# Altium PCB PCB atium .pcbdoc
Units mm, origin at the board's own origin, x right, y up, seen from the top; angles counter-clockwise.
Board outline 277.29 x 166.6 mm, 2 copper layers (Top Layer, Bottom Layer); 98 components, 97 nets, 331 pads, 103 vias.
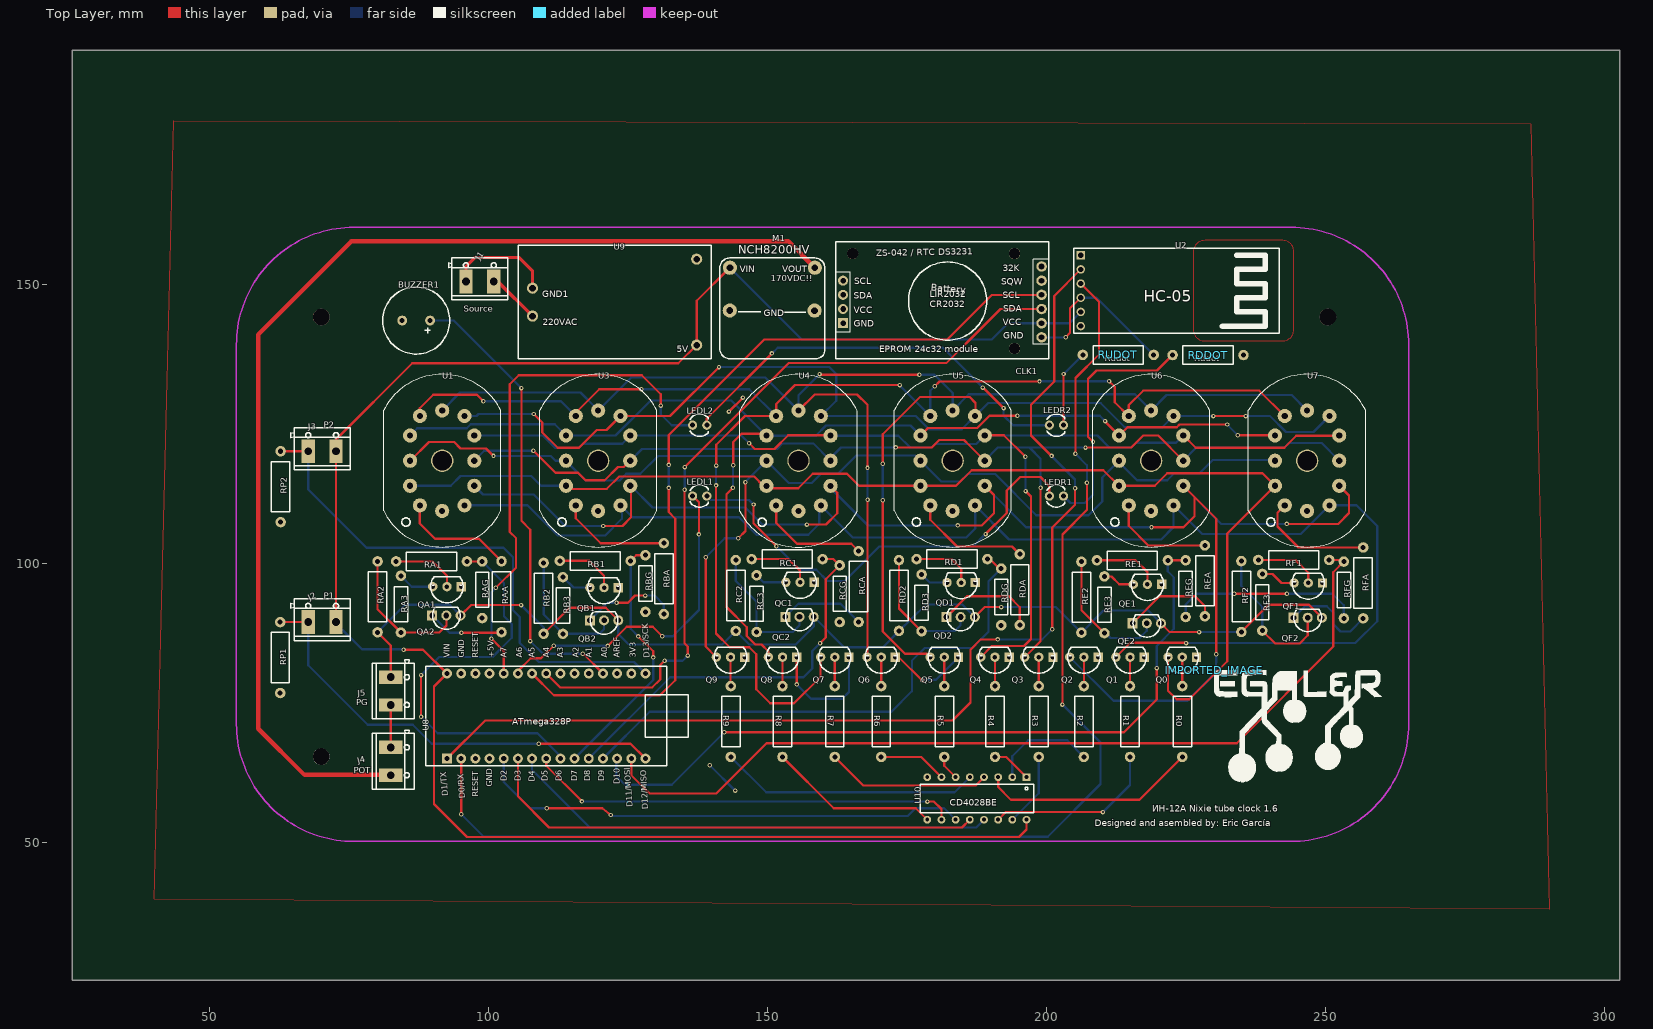
[diagram p0: Top Layer view]
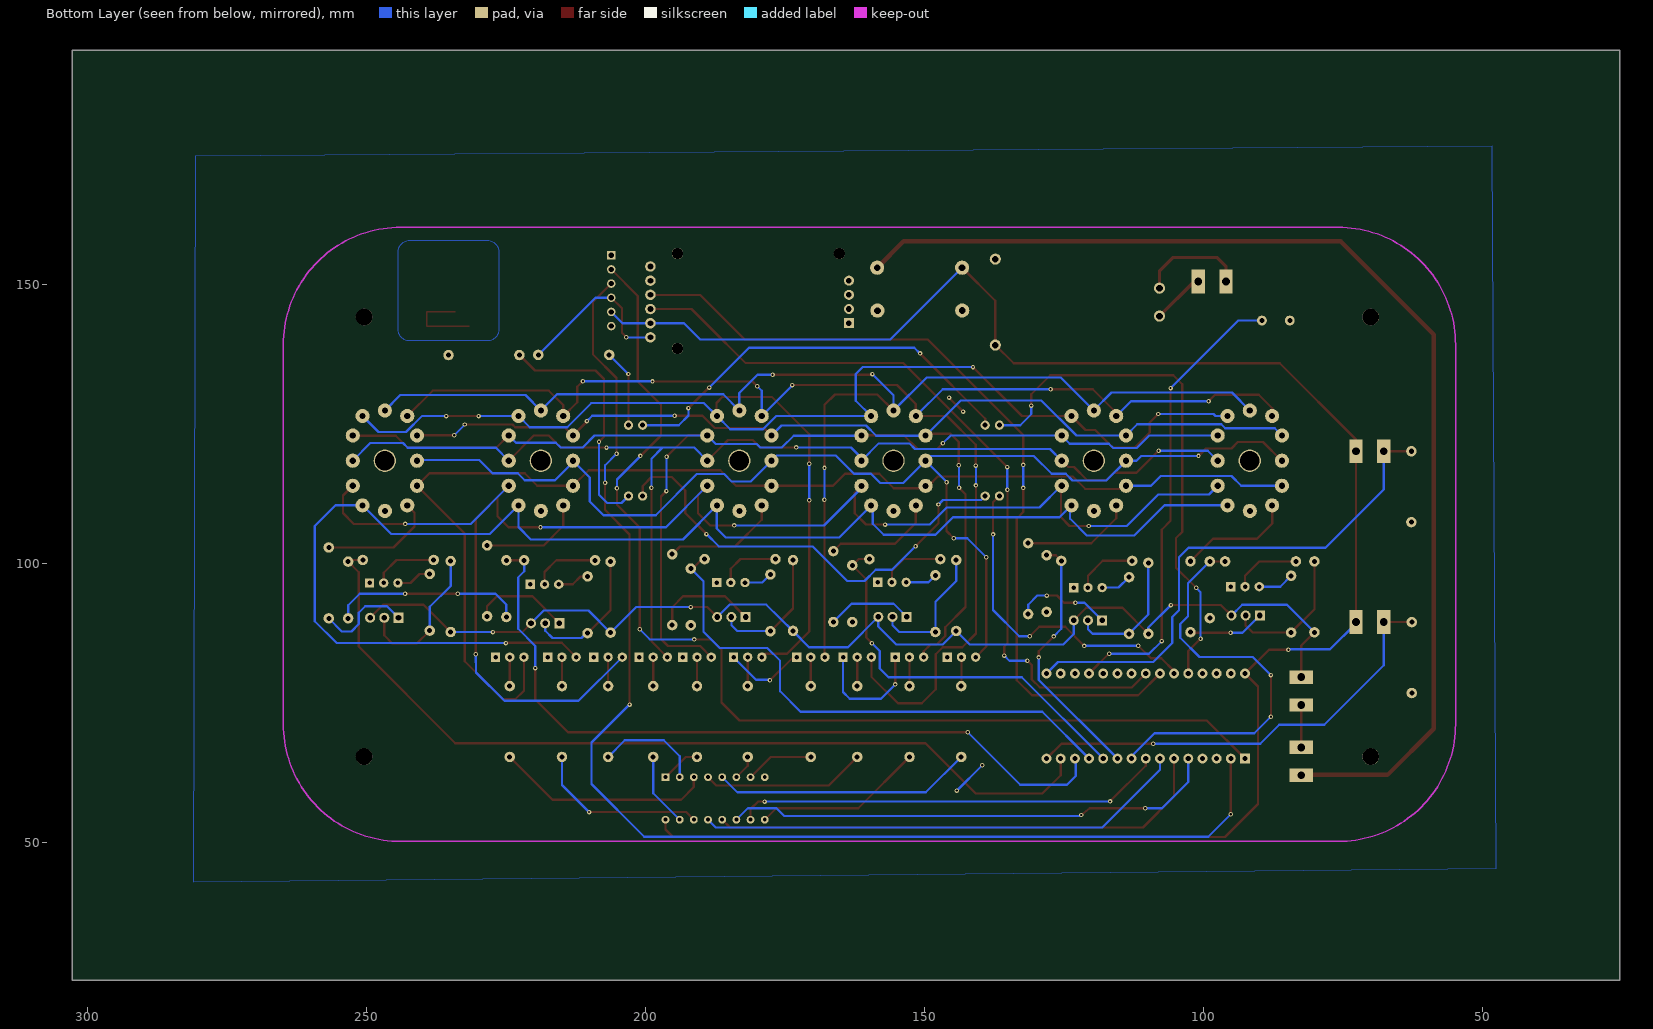
[diagram p1: Bottom Layer view, seen from below]

## Layer stack, top to bottom
Top Layer: signal copper (thickness not stored)
Dielectric: dielectric 0.32, FR-4, Dk 4.8
Bottom Layer: signal copper (thickness not stored)

## Board outline
302.688,25.4 25.4,25.4 25.4,192 302.688,192

## Components (designator, comment, footprint, x,y, rotation, side; value= is the part's Value field where it differs from the comment)
BUZZER1 "PS1240P02CT3" B-12*5.0 87.047,143.54 r180 top
CLK1 "ZS_042/DS3231" ZS-042/DS3231 162.246,157.04 r0 top
IMPORTED_IMAGE "IMPORTED_IMAGE" IMPORTED_IMAGE 230.004,80.87 r0 top
J1 "SUPPLY BLOCK" TERMINAL_BLOCK_2P_5 98.447,150.54 r0 top
J2 "P1 BLOCK" TERMINAL_BLOCK_2P_5 70.197,89.525 r0 top
J3 "P2 BLOCK" TERMINAL_BLOCK_2P_5 70.197,120.124 r0 top
J4 "POT1 200K" TERMINAL_BLOCK_2P_5 82.497,64.59 r270 top
J5 "PG" TERMINAL_BLOCK_2P_5 82.492,77.175 r270 top
LEDL1 "204-10SURD/S530-A3" LED-3MM/2.54 137.837,112.105 r90 top
LEDL2 "204-10SURD/S530-A3" LED-3MM/2.54 137.837,124.8 r90 top
LEDR1 "204-10SURD/S530-A3" LED-3MM/2.54 201.741,112.105 r90 top
LEDR2 "204-10SURD/S530-A3" LED-3MM/2.54 201.741,124.8 r90 top
M1 "M1" ?#1 150.846,148.092 r0 top
Q0 "MPSA42" TO92-INLINE 224.281,83.25 r180 top
Q1 "MPSA42" TO92-INLINE 214.931,83.25 r180 top
Q2 "MPSA42" TO92-INLINE 206.661,83.25 r180 top
Q3 "MPSA42" TO92-INLINE 198.581,83.25 r180 top
Q4 "MPSA42" TO92-INLINE 190.726,83.25 r180 top
Q5 "MPSA42" TO92-INLINE 181.651,83.25 r180 top
Q6 "MPSA42" TO92-INLINE 170.356,83.25 r180 top
Q7 "MPSA42" TO92-INLINE 162.036,83.25 r180 top
Q8 "MPSA42" TO92-INLINE 152.676,83.25 r180 top
Q9 "MPSA42" TO92-INLINE 143.362,83.25 r180 top
QA1 "MPSA42" TO92-INLINE 92.558,95.876 r180 top
QA2 "MPSA92" TO-92-3_L4.8-W3.7-P2.54-R 92.457,90.7 r180 top
QB1 "MPSA42" TO92-INLINE 120.702,95.705 r180 top
QB2 "MPSA92" TO-92-3_L4.8-W3.7-P2.54-R 120.707,89.835 r180 top
QC1 "MPSA42" TO92-INLINE 155.812,96.655 r180 top
QC2 "MPSA92" TO-92-3_L4.8-W3.7-P2.54-R 155.711,90.46 r180 top
QD1 "MPSA42" TO92-INLINE 184.678,96.61 r180 top
QD2 "MPSA92" TO-92-3_L4.8-W3.7-P2.54-R 184.576,90.445 r180 top
QE1 "MPSA42" TO92-INLINE 218.037,96.285 r180 top
QE2 "MPSA92" TO-92-3_L4.8-W3.7-P2.54-R 217.936,89.315 r180 top
QF1 "MPSA42" TO92-INLINE 246.857,96.535 r180 top
QF2 "MPSA92" TO-92-3_L4.8-W3.7-P2.54-R 246.756,90.305 r180 top
R0 "18k" AXIAL-0.5 224.291,71.715 r90 top
R1 "18k" AXIAL-0.5 214.921,71.715 r90 top
R2 "18k" AXIAL-0.5 206.656,71.715 r270 top
R3 "18k" AXIAL-0.5 198.586,71.715 r90 top
R4 "18k" AXIAL-0.5 190.741,71.715 r270 top
R5 "18k" AXIAL-0.5 181.656,71.715 r270 top
R6 "18k" AXIAL-0.5 170.356,71.715 r270 top
R7 "18k" AXIAL-0.5 162.032,71.715 r90 top
R8 "18k" AXIAL-0.5 152.662,71.715 r90 top
R9 "18k" AXIAL-0.5 143.412,71.715 r90 top
RA1 "18k" AXIAL-0.5 89.792,100.395 r0 top
RA2 "18k" AXIAL-0.5 80.132,94.04 r270 top
RA3 "680k" AXIAL-0.4 84.312,92.74 r270 top
RAA "22k" AXIAL-0.5 102.332,94.075 r270 top
RAG "180k" AXIAL-0.4 98.872,95.32 r270 top
RB1 "18k" AXIAL-0.5 119.127,100.5 r0 top
RB2 "18k" AXIAL-0.5 109.882,93.785 r270 top
RB3 "680k" AXIAL-0.4 113.337,92.5 r270 top
RBA "22k" AXIAL-0.5 131.412,97.315 r270 top
RBG "180k" AXIAL-0.4 128.107,96.425 r270 top
RC1 "18k" AXIAL-0.5 153.497,100.805 r0 top
RC2 "18k" AXIAL-0.5 144.308,94.285 r270 top
RC3 "680k" AXIAL-0.4 148.032,92.825 r270 top
RCA "22k" AXIAL-0.5 166.312,95.89 r270 top
RCG "180k" AXIAL-0.4 162.912,94.615 r270 top
RD1 "18k" AXIAL-0.5 183.031,100.81 r0 top
RD2 "18k" AXIAL-0.5 173.533,94.29 r270 top
RD3 "680k" AXIAL-0.4 177.586,92.975 r270 top
RDA "22k" AXIAL-0.5 195.171,95.34 r270 top
RDDOT "18k" AXIAL-0.5 228.901,137.365 r180 top
RDG "180k" AXIAL-0.4 191.851,94.035 r270 top
RE1 "18k" AXIAL-0.5 215.346,100.595 r0 top
RE2 "18k" AXIAL-0.5 206.218,93.99 r270 top
RE3 "680k" AXIAL-0.4 210.336,92.625 r270 top
REA "22k" AXIAL-0.5 228.336,96.91 r270 top
REG "180k" AXIAL-0.4 224.891,95.515 r270 top
RF1 "18k" AXIAL-0.5 244.251,100.65 r0 top
RF2 "18k" AXIAL-0.5 234.866,94.1 r270 top
RF3 "680k" AXIAL-0.4 238.616,93.075 r270 top
RFA "22k" AXIAL-0.5 256.696,96.54 r270 top
RFG "180k" AXIAL-0.4 253.226,95.28 r270 top
RP1 "22K" AXIAL-0.5 62.692,83.17 r270 top
RP2 "22K" AXIAL-0.5 62.772,113.78 r270 top
RUDOT "18k" AXIAL-0.5 212.811,137.39 r180 top
U1 "IN-12a" IN-12A 91.707,118.44 r0 top
U2 "HC-05 Module 6Pin" "HC-05 MODULE 6PIN" 206.091,142.55 r0 top
U3 "IN-12a" IN-12A 119.647,118.44 r0 top
U4 "IN-12a" IN-12A 155.537,118.425 r0 top
U5 "IN-12a" IN-12A 183.147,118.44 r0 top
U6 "IN-12a" IN-12A 218.707,118.44 r0 top
U7 "IN-12a" IN-12A 246.647,118.44 r0 top
U8 "ARDUINO_NANO" ARDUINO_NANO 110.347,72.69 r90 top
U9 "HLK-PM01" PWRM-TH_HLK-PM01 122.597,146.84 r0 top
U10 "MC14028BCP" DIP16 187.491,57.935 r180 top
? "" ?#2 137.602,139.512 r0 top
? "" ?#2 105.659,138.851 r0 top
? "" ?#2 68.077,146.896 r0 top
? "" ?#2 69.481,76.563 r0 top
? "" ?#2 62.384,105.255 r0 top
? "" ?#2 159.987,143.359 r0 top
? "" ?#2 182.122,159.463 r0 top
? "" ?#2 159.853,147.197 r0 top
? "" ?#2 181.042,156.751 r0 top

## Footprints (in the part's own frame and the unit in brackets; to place one, negate y for a bottom-side part, rotate by r counter-clockwise, add the part's x,y. Pads: shape width x height; smd on the part's side, far side on the other; paste and mask are expansions set on the pad)
ARDUINO_NANO [mil]
  rect 70x70 hole 36: 1(-300,700)
  round 70 hole 36: 2(-300,600) 3(-300,500) 4(-300,400) 5(-300,300) 6(-300,200) 7(-300,100) 8(-300,0) 9(-300,-100) 10(-300,-200) 11(-300,-300) 12(-300,-400) 13(-300,-500) 14(-300,-600) 15(-300,-700) 16(300,-700) 17(300,-600) 18(300,-500) 19(300,-400) 20(300,-300) 21(300,-200) 22(300,-100) 23(300,0) 24(300,100) 25(300,200) 26(300,300) 27(300,400) 28(300,500) 29(300,600) 30(300,700)
  silkscreen extent -350,-1000 350,850
AXIAL-0.4 [mil]
  round 74 hole 35.4: 1(-200,0) 2(200,0)
  silkscreen extent -124,-47 124,47
AXIAL-0.5 [mil]
  round 74 hole 35.4: 1(-250,0) 2(250,0)
  silkscreen extent -177,-65 177,65
B-12*5.0 [mil]
  round 70 hole 35.4: 1(-98.45,0) 2(98.45,0)
  silkscreen extent -236,-236 236,236
DIP16 [mil]
  rect 55x55 hole 28: 1(-350,-150)
  round 55 hole 28: 2(-250,-150) 3(-150,-150) 4(-50,-150) 5(50,-150) 6(150,-150) 7(250,-150) 8(350,-150) 9(350,150) 10(250,150) 11(150,150) 12(50,150) 13(-50,150) 14(-150,150) 15(-250,150) 16(-350,150)
  silkscreen extent -400,-100 400,100
"HC-05 MODULE 6PIN" [mil]
  round 60 hole 36: 1(0,0) 2(0,100) 3(0,200) 4(0,300) 5(0,400)
  rect 60x60 hole 36: 6(0,500)
  Top Layer lines w10: 1000,0 1300,0 1300,100 1100,100
  silkscreen extent -50,-50 1400,550
IMPORTED_IMAGE [mm]
  silkscreen extent 0,-20 30,0
IN-12A [mm]
  round 2.54 hole 1.1: 0(-5.75,-4.5) 1(4,-8) 2(5.75,-4.5) 3(5.75,0) 4(5.75,4.5) 5(3.998,8.001) 6(0,9) 7(-4.003,8) 8(-5.75,4.5) 9(-5.75,0) A(-4.003,-8.001) LHDP(-0.003,-8.999)
  round 4 hole 3.5: 13(0,0)
  silkscreen extent -10.5,-15.48 10.5,15.48
LED-3MM/2.54 [mil]
  round 65 hole 35.43: 1(0,50) 2(0,-50)
  silkscreen extent -79,-59 79,69
PWRM-TH_HLK-PM01 [mm]
  round 2 hole 1.2: 1(-14.7,2.5) 2(-14.7,-2.5) 3(14.7,7.7) 4(14.7,-7.7)
  silkscreen extent -17.24,-10.12 17.3,10.2
TERMINAL_BLOCK_2P_5 [mm]
  rect 2.38x4.285 hole 1.402: 1(2.489,0) 2(-2.489,0)
  silkscreen extent -5.59,-3.3 5,4.22
TO92-INLINE [mil]
  rect 66x66 hole 32: 1(-100,0)
  round 66 hole 32: 2(0,0) 3(100,0)
  silkscreen extent -114,-70 114,114
TO-92-3_L4.8-W3.7-P2.54-R [mm]
  rect 1.8x1.8 hole 1: 1(2.54,0)
  round 1.8 hole 1: 2(0,0) 3(-2.54,0)
  silkscreen extent -2.48,-1.5 2.48,2.48
ZS-042/DS3231 [mm]
  silkscreen extent 0,-20.32 38.1,0.64
?#1 [mm]
  round 2.54 hole 1.2: 1(-7.6,4.917) 1(-7.599,4.917) 2(7.62,4.917) 3(-7.62,-2.736) 3(-7.619,-2.751) 4(7.571,-2.766)
  silkscreen extent -9.4,-11.37 9.4,6.66
?#2 [mm]

## Free pads (board coordinates)
  round 1.8 hole 1: 1(163.516,150.69) 2(163.516,148.15) 3(163.516,145.61)
  rect 1.8x1.8 hole 1: 4(163.516,143.07)
  round 1.88 hole 1.016: 5(199.076,153.23) 6(199.076,150.69) 7(199.076,148.15) 8(199.076,145.61) 9(199.076,143.07) 10(199.076,140.53)
  round 3 hole 3 unplated: ""(70.037,65.43) ""(70.037,144.17) ""(250.377,65.43) ""(250.377,144.17)
  round 2 hole 2 unplated: ""(165.246,155.54) ""(194.246,138.54) ""(194.246,155.54)

## Via types
v1: diameter 0.8, hole 0.4, Top Layer to Bottom Layer, 103 vias

## Nets (pads, with @x,y where several pads share a name; then routed paths per layer and width w, separated by ;. In a path a pad name is that pad's centre, name@x,y a point inside that pad or via, vN(x,y) a via of type N, cw(c..) or ccw(c..) an arc to the next point about the centre after c; other vN are vias at no path point)
5V: J2.1 J3.1 M1.1 pad.9 U2.2 U8.30 U9.4 U10.16 | length 350
  Top Layer w0.4: J2.1@72.686,89.29 72.686,120.09 72.687,122.23 86.347,135.89 133.998,135.89 137.246,139.139 U9.4 ; v1(84.797,84.59) 88.287,84.59 U8.30 ; U8.30 90.246,77.988 90.246,56.939 96.147,51.039 195.047,51.039 196.383,52.372 U10.16 ; U9.4 137.296,147.106 M1.1@143.247,153.057
  Bottom Layer w0.4: J2.1@72.685,89.289 77.334,84.64 80.297,84.64 84.747,84.64 v1(84.797,84.59) ; M1.1@143.246,153.01 156.121,140.134 190.142,140.134 193.076,143.071 pad.9 204.071,143.071 U2.2
170V: J4.1 M1.2 | length 206.4
  Top Layer w0.8: J4.1 82.456,62.139 67.046,62.139 58.748,70.439 58.748,141.039 75.446,157.739 153.736,157.739 M1.2
220VAC: J1.1 U9.2 | length 9.5
  Top Layer w0.6: J1.1 101.696,150.54 U9.2
BC0: Q0.2 R0.2 | length 5.2
  Top Layer w0.4: Q0.2@224.282,83.249 R0.2
BC1: Q1.2 R1.2 | length 5.2
  Top Layer w0.4: R1.2 Q1.2@214.932,83.249
BC2: Q2.2 R2.1 | length 5.2
  Top Layer w0.4: R2.1 Q2.2@206.662,83.249
BC3: Q3.2 R3.2 | length 5.2
  Top Layer w0.4: Q3.2@198.582,83.249 R3.2
BC4: Q4.2 R4.1 | length 5.2
  Top Layer w0.4: Q4.2@190.726,83.249 R4.1
BC5: Q5.2 R5.1 | length 5.2
  Top Layer w0.4: Q5.2@181.651,83.249 R5.1
BC6: Q6.2 R6.1 | length 5.2
  Top Layer w0.4: R6.1 Q6.2
BC7: Q7.2 R7.2 | length 5.2
  Top Layer w0.4: R7.2 Q7.2@162.037,83.249
BC8: Q8.2 R8.2 | length 5.2
  Top Layer w0.4: R8.2 Q8.2
BC9: Q9.2 R9.2 | length 5.2
  Top Layer w0.4: Q9.2 143.362,78.115 R9.2
BT1: U2.5 U8.1 | length 196.7
  Top Layer w0.4: U8.1 99.408,71.91 183.126,71.91 186.357,75.141 186.357,84.595 188.191,86.429 v1(191.247,86.429) ; v1(200.861,119.29) 197.201,122.95 197.201,128.47 201.341,132.61 201.341,147.961 U2.5 ; v1(200.977,88.225) 200.977,106.47 205.076,110.57 v1(205.076,113.485)
  Bottom Layer w0.4: v1(191.247,86.429) 199.181,86.429 v1(200.977,88.225) ; v1(200.861,119.29) 205.076,115.075 v1(205.076,113.485)
BT2: U2.4 U8.2 | length 228.3
  Top Layer w0.4: v1(95.107,55.11) U8.2 ; v1(202.821,74.755) 202.822,105.23 207.197,109.605 v1(207.197,114.505) ; v1@205.161,119.68 205.161,133.259 209.388,137.485 209.388,146.873 U2.4
  Bottom Layer w0.4: v1(95.107,55.11) 99.149,51.069 200.18,51.069 209.636,60.526 209.636,67.94 v1(202.821,74.755) ; v1(205.146,119.68) 207.197,117.63 v1(207.197,114.505)
BUZZER1: BUZZER1.1 U8.19 | length 82.8
  Top Layer w0.4: v1(105.897,131.439) 105.898,107.678 107.497,106.079 v1(107.497,86.115) ; v1(116.892,83.855) 116.963,83.855 U8.19
  Bottom Layer w0.4: BUZZER1.1 93.797,143.54 v1(105.897,131.439) ; v1(107.497,86.115) 109.757,83.855 v1(116.892,83.855)
DDOT: LEDL1.1 U8.25 | length 59.7
  Top Layer w0.4: U8.25 105.27,80.775 107.564,83.03 109.405,83.03 v1(111.672,85.295) ; v1(121.347,85.26) 124.772,88.685 129.442,88.685 v1(131.132,86.995) ; LEDL1.1 137.691,110.98 v1(137.691,105.24)
  Bottom Layer w0.4: v1(111.672,85.295) 121.312,85.295 v1(121.347,85.26) ; v1(131.132,86.995) 133.004,86.995 137.691,91.682 v1(137.691,105.24)
GND1: J1.2 U9.1 | length 19.3
  Top Layer w0.6: J1.2 95.959,153.2 97.607,154.849 105.438,154.849 107.897,152.39 U9.1
GND2: BUZZER1.2 M1.3 pad.10 RAG.2 RBG.2 RCG.2 RDDOT.1 RDG.2 REG.2 RFG.2 RP1.2 RP2.2 RUDOT.1 U2.3 U8.4 U8.18 U8.29 U9.3 U10.8 | length 70.9
  Top Layer w0.4: v1(203.406,140.565) 204.191,141.349 204.191,145.73 U2.3 ; v1(233.606,94.62) v1(243.031,94.62)
  Bottom Layer w0.4: v1(139.627,63.895) 144.172,59.35 v1(144.192,59.35) ; pad.10 203.372,140.531 v1(203.406,140.565) ; U2.3 208.921,147.63 RUDOT.1 ; REG.2 224.891,92.69 226.821,94.62 v1(233.606,94.62) ; v1(243.031,94.62) 251.156,94.62 253.226,92.549 RFG.2
GND3: M1.4 Q0.1 Q1.1 Q2.1 Q3.1 Q4.1 Q5.1 Q6.1 Q7.1 Q8.1 Q9.1 QA1.1 QB1.1 QC1.1 QD1.1 QE1.1 QF1.1 | length 40.4
  Top Layer w0.4: v1(143.072,127.245) 143.087,127.245 v1(145.577,129.735) ; v1(155.216,78.36) Q8.1 ; Q6.1@172.896,83.25 173.516,83.25 v1(177.676,79.09)
  Bottom Layer w0.4: v1(155.216,78.36) 157.792,75.784 163.37,75.784 164.577,76.99 Q7.1@164.577,83.249 ; v1(177.676,79.09) 177.796,79.21 180.151,79.21 Q5.1
J4_2: J4.2 J5.1 | length 7.6
  Top Layer w0.4: J5.1 J4.2
LEDL1_2: LEDL1.2 LEDR1.1 | length 82.2
  Top Layer w0.4: v1(147.486,110.59) 147.486,107.225 v1(151.587,103.125) ; v1(189.046,105.295) 192.827,109.075 192.827,113.088 195.242,115.504 198.872,115.504 200.472,113.904 LEDR1.1
  Bottom Layer w0.4: LEDL1.2 139.797,111.415 146.662,111.415 v1(147.486,110.59) ; v1(151.587,103.125) 155.814,98.895 158.707,98.895 160.726,96.876 163.838,96.876 170.053,103.089 186.842,103.089 v1(189.046,105.295)
LEDR1_2: LEDR1.2 RDDOT.2 | length 44.5
  Top Layer w0.4: v1(208.292,121.835) 207.386,122.74 207.386,133.055 208.913,134.579 219.766,134.579 RDDOT.2
  Bottom Layer w0.4: LEDR1.2 204.276,110.84 206.811,110.84 208.292,112.32 v1(208.292,121.835)
LEDR2_1: LEDL2.2 LEDR2.1 | length 74.3
  Top Layer w0.4: LEDL2.2 139.106,125.974 v1(150.777,137.645) ; v1(188.551,131.54) 188.591,131.54 v1(192.271,127.86)
  Bottom Layer w0.4: v1(150.777,137.645) 151.816,138.685 181.406,138.685 v1(188.551,131.54) ; v1(192.271,127.86) 192.27,126.515 193.987,124.8 LEDR2.1
LEDR2_2: LEDR2.2 RUDOT.2 | length 14
  Top Layer w0.4: LEDR2.2 v1@203.012,133.974
  Bottom Layer w0.4: v1@203.011,133.975 203.046,133.975 RUDOT.2
  other v1: 203.011,133.97
N0: Q0.3 U1.0 U3.0 U4.0 U5.0 U6.0 U7.0 | length 219.6
  Top Layer w0.4: U3.0 114.445,113.391 121.199,113.391 123.414,115.606 147.592,115.606 149.273,113.924 U4.0 150.221,113.49 155.496,113.49 158.097,116.091 164.226,116.091 166.378,113.939 U5.0 183.746,113.939 186.55,116.744 210.152,116.744 U6.0 219.347,113.939 221.597,116.19 238.646,116.19 U7.0 232.341,105.385 232.341,82.525 225.527,75.71 223.281,75.71 221.742,77.249 Q0.3@221.742,83.249
  Bottom Layer w0.4: U1.0 93.246,113.939 94.996,115.689 107.648,115.689 109.398,113.939 U3.0
N1: Q1.3 U1.1 U3.1 U4.1 U5.1 U6.1 U7.1 | length 262.8
  Top Layer w0.4: Q1.3@212.391,83.25 214.956,85.815 224.906,85.815 v1(224.956,85.765)
  Bottom Layer w0.4: U1.1 106.997,110.44 112.397,105.04 120.897,105.04 123.897,108.04 123.897,110.19 U3.1 125.786,108.301 144.884,108.301 148.006,105.179 157.284,105.179 159.245,107.14 159.245,110.134 U4.1 ; U4.1 165.273,104.689 185.595,104.689 187.196,106.289 187.196,110.391 U5.1 193.246,104.341 220.497,104.341 222.707,106.551 U6.1 227.846,105.301 245.509,105.301 U7.1 255.496,110.439 259.197,106.738 259.197,89.69 255.273,85.766 v1(224.956,85.765)
N2: Q2.3 U1.2 U3.2 U4.2 U5.2 U6.2 U7.2 | length 273.8
  Top Layer w0.4: v1(120.547,106.74) 123.997,106.74 125.547,108.29 125.547,113.79 U3.2 ; v1(157.046,106.99) 160.447,106.99 162.497,109.04 162.497,112.715 U4.2 ; v1(184.046,106.84) 188.346,106.84 190.546,109.04 190.546,112.291 U5.2 ; v1(218.771,106.53) 224.521,106.53 226.476,108.484 226.476,111.921 ; U6.2 230.376,108.014 230.376,83.769 v1(230.351,83.745) ; v1(242.986,107.115) 252.202,107.115 254.147,109.06 254.147,112.189 U7.2
  Bottom Layer w0.4: U1.2 97.457,113.93 98.997,112.39 108.097,112.39 113.747,106.74 v1(120.547,106.74) ; U3.2 125.496,113.939 129.4,110.035 146.002,110.035 149.047,106.99 v1(157.046,106.99) ; U4.2 161.287,113.55 167.997,106.84 v1(184.046,106.84) ; U5.2 196.307,106.53 v1(218.771,106.53) ; Q2.3@204.122,83.249 211.955,75.425 225.24,75.425 230.343,80.5 v1@230.35,83.744 ; U6.2 231.282,107.115 v1(242.986,107.115)
N3: Q3.3 U1.3 U3.3 U4.3 U5.3 U6.3 U7.3 | length 213.3
  Top Layer w0.4: v1(108.047,120.24) 112.024,116.261 116.025,116.261 117.371,114.915 120.805,114.915 123.182,117.29 124.247,117.29 U3.3 ; v1(172.961,120.805) 179.413,120.805 180.747,122.139 185.197,122.139 186.146,121.189 U5.3 ; Q3.3 198.901,86.11 v1(198.901,113.59) ; v1(206.946,120.79) 215.146,120.79 217.297,122.939 219.956,122.939 U6.3
  Bottom Layer w0.4: U1.3 99.257,120.24 v1(108.047,120.24) ; U3.3 127.493,120.536 151.694,120.536 152.697,121.539 158.173,121.539 U4.3 ; U4.3 161.287,118.93 163.146,120.79 172.946,120.79 v1(172.961,120.805) ; U5.3 191.247,120.79 v1(206.946,120.79) ; 194.818,120.79 196.911,120.79 198.901,118.799 v1(198.901,113.59) ; U6.3 226.756,120.739 242.547,120.739 243.396,121.59 249.248,121.59 U7.3
N4: Q4.3 U1.4 U3.4 U4.4 U5.4 U6.4 U7.4 | length 216.4
  Top Layer w0.4: v1(146.691,121.545) 147.696,120.54 151.246,120.54 153.696,122.99 161.221,122.99 U4.4@161.286,122.925 ; Q4.3@188.186,83.249 190.162,85.225 195.915,85.225 197.181,86.491 197.181,112.025 v1(196.212,112.995) ; U5.4 188.946,122.989 192.327,122.989 v1(196.186,119.13) ; U6.4 224.496,122.94 226.696,120.74 242.546,120.74 244.696,122.89 252.347,122.89 U7.4
  Bottom Layer w0.4: U1.4 109.723,122.939 111.928,120.734 116.197,120.734 116.952,121.491 123.947,121.491 U3.4 145.298,122.939 v1@146.69,121.544 ; U4.4@161.288,122.926 173.413,122.926 175.512,120.825 179.431,120.825 180.045,121.44 187.396,121.44 U5.4 209.083,122.939 211.226,120.795 215.153,120.795 216.017,121.658 223.177,121.658 U6.4 ; v1(196.186,119.13) 196.186,113.02 v1(196.212,112.995)
N5: Q5.3 U1.5 U3.5 U4.5 U5.5 U6.5 U7.5 | length 252.5
  Top Layer w0.4: v1@108.12,126.804 109.647,125.278 109.647,123.485 112.393,120.739 116.197,120.739 119.395,123.939 121.143,123.939 U3.5 132.533,126.441 141.292,135.2 v1(141.292,135.21) ; v1(170.627,117.875) 170.627,123.155 177.34,129.87 186.167,129.87 187.246,128.791 187.246,126.393 U5.5@187.196,126.342 ; v1(170.646,111.365) 170.646,87.825 174.626,83.845 178.516,83.845 Q5.3 ; v1(229.856,126.43) 235.601,126.43 v1@235.636,126.465
  Bottom Layer w0.4: U1.5 97.848,126.442 98.212,126.805 v1(108.122,126.805) ; v1(141.292,135.21) 161.047,135.21 162.301,133.955 162.301,129.193 U4.5 176.558,126.426 178.895,124.089 184.795,124.089 U5.5@187.145,126.439 ; v1(170.627,117.875) 170.646,117.875 v1(170.646,111.365) ; U5.5 189.482,128.75 209.687,128.75 213.998,124.44 220.703,124.44 U6.5 222.716,126.43 v1(229.856,126.43) ; v1@235.636,126.465 239.971,126.465 242.847,123.589 247.792,123.589 U7.5
  other v1: 235.636,126.43
N6: Q6.3 U1.6 U3.6 U4.6 U5.6 U6.6 U7.6 | length 235.6
  Top Layer w0.4: U4.6 158.422,130.31 166.027,130.31 167.897,128.44 v1(167.896,117.14) ; v1(159.311,133.945) 159.412,133.845 v1(177.191,133.845) ; Q6.3@167.816,83.25 167.896,83.33 167.896,111.46 v1(167.907,111.46)
  Bottom Layer w0.4: U1.6 94.907,130.64 116.473,130.64 119.647,127.466 U3.6 125.527,133.32 149.642,133.32 U4.6 155.537,130.17 v1(159.311,133.945) ; v1(167.896,117.14) 167.907,117.13 v1(167.907,111.46) ; v1(177.191,133.845) 179.88,133.845 183.147,130.579 U5.6 186.047,130.34 215.807,130.34 U6.6 221.457,130.19 243.897,130.19 U7.6
N7: Q7.3 U1.7 U3.7 U4.7 U5.7 U6.7 U7.7 | length 263.2
  Top Layer w0.4: U1.7 87.703,127.847 90.097,130.24 97.947,130.24 v1(99.097,129.09) ; U3.7 115.644,127.036 119.838,131.23 v1(127.402,131.23) ; v1(140.767,114.015) 140.767,87.473 143.236,85.004 146.731,85.004 147.97,83.764 147.97,77.485 150.477,74.981 154.724,74.981 159.497,79.754 Q7.3@159.497,83.249 ; v1(140.797,117.56) 140.797,121.275 145.948,126.426 151.534,126.426 151.534,128.61 154.908,131.985 v1(173.666,131.985) ; v1(179.946,131.79) 180.797,132.639 v1(198.706,132.64) ; v1(211.171,132.665) 212.171,131.665 212.171,128.905 214.636,126.44 U6.7 214.703,128.397 217.296,130.99 238.094,130.99 U7.7
  Bottom Layer w0.4: v1(99.097,129.09) 112.994,129.09 U3.7 ; v1(127.402,131.23) 146.729,131.23 U4.7@151.533,126.425 ; v1(140.767,114.015) 140.767,117.53 v1(140.797,117.56) ; v1(173.666,131.985) 173.666,131.917 U5.7 179.143,130.987 v1(179.946,131.79) ; v1(198.706,132.64) 198.731,132.665 v1(211.171,132.665)
N8: Q8.3 U1.8 U3.8 U4.8 U5.8 U6.8 U7.8 | length 217.6
  Top Layer w0.4: v1(143.782,113.58) 142.631,112.429 142.631,92.245 146.276,88.6 146.276,87.015 147.772,85.519 148.918,85.519 150.137,84.3 Q8.3 ; v1(143.847,117.615) 143.847,121.805 145.321,123.279 149.433,123.279 U4.8@149.786,122.926 ; U5.8 178.737,124.28 187.536,124.28 189.736,126.48 v1(194.752,126.48) ; v1(210.446,125.54) 210.446,125.448 U6.8 214.457,124.44 223.297,124.44 223.781,124.925 v1(232.361,124.925) ; v1(234.231,122.985) 240.896,122.985 U7.8
  Bottom Layer w0.4: U1.8 87.257,124.239 96.101,124.239 96.838,124.976 111.859,124.976 U3.8 122.746,122.939 129.047,129.24 143.472,129.24 149.786,122.926 158.628,122.926 160.457,124.755 175.58,124.755 U5.8 ; v1(143.782,113.58) 143.782,117.551 v1@143.845,117.615 ; v1(194.752,126.48) 209.507,126.48 v1(210.446,125.54) ; v1(232.361,124.925) 232.361,124.854 v1(234.231,122.985)
N9: Q9.3 U1.9 U3.9 U4.9 U5.9 U6.9 U7.9 | length 222.2
  Top Layer w0.4: U1.9 85.997,118.44 89.347,121.791 93.845,121.791 94.996,120.64 99.548,120.64 v1(100.896,119.29) ; v1(138.916,101.135) 138.916,85.155 Q9.3 ; v1(144.726,104.555) 146.032,105.86 v1(146.032,114.58)
  Bottom Layer w0.4: v1(100.896,119.29) 111.143,119.289 111.991,118.44 U3.9 113.896,118.4 117.406,114.889 123.457,114.889 124.658,116.091 127.206,116.091 130.409,119.294 148.918,119.294 U4.9 ; v1(138.916,101.135) 142.337,104.554 v1(144.726,104.555) ; v1(146.032,114.58) 146.032,114.67 U4.9 ; U7.9 240.797,118.539 229.708,118.539 227.353,116.185 222.852,116.185 221.607,114.94 216.157,114.94 212.956,118.141 U6.9 209.962,115.446 209.962,111.125 207.505,108.669 198.138,108.669 190.767,116.04 185.847,116.04 184.496,114.689 181.148,114.689 U5.9 176.472,119.365 165.882,119.365 162.613,116.096 159.563,116.096 157.907,114.44 153.772,114.44 U4.9
NA: RA1.2 RAG.1 U8.9 | length 73.4
  Top Layer w0.4: v1(87.932,72.565) v1(87.932,80.03) ; RA1.2 96.147,100.4 RAG.1
  Bottom Layer w0.4: v1(87.932,72.565) 90.898,69.599 108.76,69.599 112.888,65.474 U8.9 ; v1(87.932,80.03) 91.186,83.284 100.736,83.284 104.176,86.723 104.176,89.195 102.776,90.594 102.776,96.495 RAG.1
NB: RB1.2 RBG.1 U8.10 | length 46
  Top Layer w0.4: RB1.2 126.481,101.505 RBG.1 ; v1(126.842,86.96) 129.512,84.289 v1(129.512,83.205)
  Bottom Layer w0.4: U8.10 129.512,79.155 v1(129.512,83.205) ; RB1.2@125.476,100.485 125.476,88.325 v1(126.842,86.96)
NC: RC1.2 RCG.1 U8.11 | length 70.8
  Top Layer w0.4: v1@159.395,85.74 160.432,86.774 160.432,97.213 RCG.1 ; RC1.2 161.802,100.805 RCG.1
  Bottom Layer w0.4: U8.11 132.537,79.639 156.411,79.639 157.991,81.219 157.991,84.336 v1@159.395,85.74
  other v1: 159.397,85.74
ND: RD1.2 RDG.1 U8.12 | length 97.1
  Top Layer w0.4: RD1.2 189.817,100.81 191.511,99.116 RDG.1
  Bottom Layer w0.4: U8.12 128.903,73.464 172.182,73.464 175.847,77.13 175.847,82.606 178.14,84.9 186.682,84.9 189.558,87.772 189.558,96.82 RDG.1
NE: RE1.2 REG.1 U8.13 | length 136.8
  Top Layer w0.4: v1(142.243,69.8) 213.856,69.8 219.696,75.64 v1(219.696,81.28) ; RE1.2 REG.1
  Bottom Layer w0.4: U8.13 122.906,64.93 122.906,61.956 124.463,60.399 132.842,60.399 v1(142.243,69.8) ; v1(219.696,81.28) 219.696,85.229 222.776,88.308 222.776,97.534 221.696,98.616 RE1.2
NF: RF1.2 RFG.1 U8.14 | length 159.9
  Top Layer w0.4: U8.14 125.588,62.108 128.872,58.824 140.805,58.824 149.812,67.831 234.038,67.831 251.346,85.138 251.346,98.478 RFG.1 253.225,100.65 RF1.2
NONE: 
NULL: 
PINP1: J2.2 RP1.1 U8.15 | length 80.1
  Top Layer w0.4: RP1.1 62.697,89.525 J2.2 ; v1(108.997,67.739) 125.456,67.739 U8.15
  Bottom Layer w0.4: J2.2 67.706,81.786 78.377,71.115 86.446,71.115 89.822,67.739 v1(108.997,67.739)
PINP2: J3.2 RP2.1 U8.16 | length 94.2
  Top Layer w0.4: RP2.1 62.777,120.125 J3.2
  Bottom Layer w0.4: J3.2 67.706,113.279 78.141,102.845 102.682,102.845 104.381,101.145 104.381,91.641 105.59,90.429 105.59,85.761 108.991,82.36 ; 108.992,82.375 108.991,82.36 ; U8.16 126.076,82.36 108.991,82.36
QA1_2: QA1.2 RA1.1 | length 12.1
  Top Layer w0.4: RA1.1 89.997,100.395 92.558,97.833 QA1.2
QA1_3: QA1.3 RA3.1 | length 6.5
  Bottom Layer w0.4: RA3.1 86.256,95.875 QA1.3
QA2_2: QA2.2 RA2.1 RA3.2 | length 24.9
  Top Layer w0.4: RA2.1 80.132,91.84 RA3.2 ; RA3.2 91.199,87.661 92.471,88.933 QA2.2
QA2_3: J5.2 QA2.3 QB2.3 QC2.3 QD2.3 QE2.3 QF2.3 RA2.2 RB2.2 RC2.2 RD2.2 RE2.2 RF2.2 | length 210.9
  Top Layer w0.4: RA2.2 82.492,85.33 J5.2 ; QA2.3 96.892,92.595 105.827,92.595 v1(105.842,92.58) ; RB2.2 114.522,92.075 121.006,92.075 QB2.3 ; QD2.3 188.896,92.225 v1(191.841,92.225) ; QE2.3 222.059,87.73 v1(227.291,87.73) ; RF2.2 239.745,92.629 246.969,92.629 QF2.3
  Bottom Layer w0.4: RA2.2 85.056,92.614 93.081,92.614 QA2.3 ; v1(105.842,92.58) 109.881,88.54 RB2.2 ; QB2.3 123.246,87.399 125.146,85.499 141.872,85.499 RC2.2 146.726,85.514 155.032,85.514 158.25,88.735 QC2.3 163.695,85.014 170.686,85.014 173.531,87.94 178.326,92.654 184.907,92.654 QD2.3 ; v1(191.841,92.225) 201.631,92.225 RE2.2 ; RE2.2 210.183,91.605 218.186,91.605 QE2.3 ; v1(227.291,87.73) 227.291,87.749 RF2.2
QB2_1: QB2.1 RBA.2 | length 17.4
  Top Layer w0.4: v1(122.942,92.985) 124.979,92.985 126.264,94.27 v1(128.071,94.27)
  Bottom Layer w0.4: QB2.1 121.316,92.985 v1(122.942,92.985) ; v1(128.071,94.27) 129.797,94.27 131.412,92.654 RBA.2
QC2_1: QC2.1 RCA.2 | length 15.5
  Bottom Layer w0.4: QC2.1 155.512,92.799 163.05,92.799 RCA.2
QD2_1: QD2.1 RDA.2 | length 18.7
  Top Layer w0.4: QD2.1 185.738,94.145 193.231,94.145 195.171,92.205 RDA.2
QE2_1: QE2.1 REA.2 | length 17.5
  Top Layer w0.4: QE2.1 220.22,94.14 226.581,94.14 228.336,92.385 REA.2
QF2_1: QF2.1 RFA.2 | length 17.4
  Bottom Layer w0.4: QF2.1 246.281,92.37 250.177,92.37 251.325,91.222 251.325,89.169 252.646,87.849 254.356,87.849 RFA.2@256.695,90.19
R0_1: R0.1 U10.3 | length 38.9
  Top Layer w0.4: U10.3 191.303,59.975 193.581,57.694 216.621,57.694 R0.1
R1_1: R1.1 U10.14 | length 31.2
  Top Layer w0.4: U10.14 192.667,55.49 v1(210.072,55.49)
  Bottom Layer w0.4: v1(210.072,55.49) 214.922,60.34 R1.1
R2_2: R2.2 U10.2 | length 19
  Bottom Layer w0.4: U10.2 193.845,65.514 196.688,68.354 203.667,68.354 R2.2
R3_1: R3.1 U10.15 | length 13.2
  Bottom Layer w0.4: U10.15 198.586,58.87 R3.1
R4_2: R4.2 U10.1 | length 7.1
  Top Layer w0.4: R4.2 192.762,65.365 U10.1
R5_2: R5.2 U10.6 | length 4.5
  Top Layer w0.4: R5.2 181.656,63.77 U10.6
R6_2: R6.2 U10.7 | length 12.3
  Top Layer w0.4: R6.2 177.522,65.365 U10.7
R7_1: R7.1 U10.4 | length 29.5
  Top Layer w0.4: R7.1 167.165,60.231 187.246,60.231 U10.4
R8_1: R8.1 U10.9 | length 30.6
  Top Layer w0.4: R8.1 161.841,56.185 176.543,56.185 U10.9
R9_1: R9.1 U10.5 | length 46.6
  Bottom Layer w0.4: R9.1 149.751,59.025 183.502,59.025 U10.5
RAA_2: QA2.1 RAA.2 | length 13.7
  Top Layer w0.4: v1(95.142,87.615) 102.222,87.615 RAA.2
  Bottom Layer w0.4: QA2.1 93.002,87.615 v1(95.142,87.615)
RB1_1: QB1.2 RB1.1 | length 11.2
  Top Layer w0.4: RB1.1 118.047,100.5 120.701,97.846 QB1.2
RB2_1: QB2.2 RB2.1 RB3.2 | length 23.4
  Bottom Layer w0.4: RB2.1 109.881,90.875 RB3.2 ; RB3.2 119.88,87.419 120.703,88.237 QB2.2
RB3_1: QB1.3 RB3.1 | length 5.6
  Bottom Layer w0.4: RB3.1 115.212,95.705 QB1.3
RC1_1: QC1.2 RC1.1 | length 11.6
  Top Layer w0.4: RC1.1 153.759,100.805 155.811,98.753 QC1.2
RC2_1: QC2.2 RC2.1 RC3.2 | length 24.1
  Bottom Layer w0.4: RC2.1 144.308,96.888 148.031,93.165 RC3.2 154.491,87.745 155.71,88.964 QC2.2
RC3_1: QC1.3 RC3.1 | length 5.8
  Bottom Layer w0.4: RC3.1 149.281,96.655 QC1.3
RD1_1: QD1.2 RD1.1 | length 11.2
  Top Layer w0.4: RD1.1 182.929,100.81 184.678,99.06 QD1.2
RD2_1: QD2.2 RD2.1 RD3.2 | length 22.9
  Top Layer w0.4: RD2.1 173.533,91.948 RD3.2
  Bottom Layer w0.4: RD3.2@177.958,87.94 183.52,87.94 184.577,88.994 QD2.2
RD3_1: QD1.3 RD3.1 | length 5.2
  Bottom Layer w0.4: RD3.1 179.032,96.609 QD1.3
RE1_1: QE1.2 RE1.1 | length 12.1
  Top Layer w0.4: RE1.1 215.926,100.595 218.037,98.484 QE1.2
RE2_1: QE2.2 RE2.1 RE3.2 | length 24.3
  Top Layer w0.4: RE2.1 206.218,91.664 RE3.2
  Bottom Layer w0.4: RE3.2@210.431,87.64 211.411,86.66 216.636,86.66 217.936,87.959 QE2.2
RE3_1: QE1.3 RE3.1 | length 5.7
  Top Layer w0.4: RE3.1 211.591,97.705 213.011,96.285 QE1.3
RF1_1: QF1.2 RF1.1 | length 11.7
  Top Layer w0.4: RF1.1 244.556,100.65 246.857,98.349 QF1.2
RF2_1: QF2.2 RF2.1 RF3.2 | length 26.9
  Top Layer w0.4: RF3.2 240.921,85.69 245.311,85.69 246.766,87.145 QF2.2
  Bottom Layer w0.4: RF2.1 234.866,96.004 238.616,92.254 RF3.2
RF3_1: QF1.3 RF3.1 | length 6.4
  Top Layer w0.4: RF3.1 240.432,98.155 242.052,96.535 QF1.3
S$19: 
S$21: 
S$61: 
S$87: 
SCL: pad.7 U8.24 | length 150
  Top Layer w0.4: U8.24 111.712,76.406 130.741,76.406 133.457,79.121 133.457,108.045 132.272,109.23 v1(132.272,113.555) ; v1(132.292,117.69) 132.292,123.046 149.375,140.13 182.184,140.13 190.195,148.14 pad.7
  Bottom Layer w0.4: v1(132.272,113.555) 132.292,113.575 v1(132.292,117.69)
SDA: pad.8 U8.23 | length 139.9
  Top Layer w0.4: U8.23 112.827,77.831 129.352,77.831 130.767,79.246 130.767,81.841 v1@131.542,82.614 ; v1(135.127,113.245) 135.127,85.73 135.697,85.16 v1(135.697,83.535) ; v1(135.172,117.305) 153.827,135.96 182.068,135.96 188.748,142.639 ; 188.746,142.64 191.716,145.61 pad.8
  Bottom Layer w0.4: v1(131.542,82.615) 134.777,82.615 v1(135.697,83.535) ; v1(135.127,113.245) 135.172,113.29 v1(135.172,117.305)
U1_A: RAA.1 U1.A | length 20.7
  Top Layer w0.4: U1.A 87.703,107.173 90.417,104.46 98.297,104.46 RAA.1
U3_A: RBA.1 U3.A | length 19.9
  Top Layer w0.4: U3.A 115.644,108.118 120.097,103.665 RBA.1
U4_A: RCA.1 U4.A | length 20
  Top Layer w0.4: U4.A 151.533,107.278 155.247,103.565 164.986,103.565 RCA.1
U5_A: RDA.1 U5.A | length 21.2
  Top Layer w0.4: U5.A 179.144,107.854 183.927,103.071 193.792,103.071 RDA.1
U6_A: REA.1 U6.A | length 18.8
  Top Layer w0.4: U6.A 214.704,106.766 218.211,103.259 REA.1
U7_A: RFA.1 U7.A | length 21.2
  Top Layer w0.4: U7.A 241.336,109.131 241.336,106.65 245.097,102.89 RFA.1
U8_5: U8.5 U10.11 | length 89
  Top Layer w0.4: v1@110.447,56.172 120.406,56.172 v1(121.907,54.965)
  Bottom Layer w0.4: U8.5 102.728,60.874 107.417,56.185 v1(110.447,56.185) ; v1(121.907,54.965) 122.067,54.805 175.125,54.805 176.505,56.185 181.62,56.185 U10.11
U8_6: U8.6 U10.12 | length 90.6
  Top Layer w0.4: U8.6 105.268,58.321 110.858,52.73 184.828,52.73 U10.12
U8_7: U8.7 U10.13 | length 87.8
  Bottom Layer w0.4: U8.7 107.808,63.084 118.161,52.73 187.368,52.73 U10.13
U8_8: U8.8 U10.10 | length 77.2
  Top Layer w0.4: U8.8 110.348,63.805 116.737,57.416 v1(116.737,57.405) ; v1(178.62,57.379) 179.786,57.379 181.143,56.025 U10.10
  Bottom Layer w0.4: v1(116.737,57.405) 178.594,57.405 v1(178.62,57.379)
UDOT: LEDL2.1 U8.26 | length 94.3
  Top Layer w0.4: v1(100.522,86.555) 102.728,84.348 U8.26 ; v1(101.297,95.67) 104.952,99.325 104.952,104.545 103.822,105.675 103.822,132.14 105.436,133.754 127.457,133.754 130.862,130.35 v1(130.862,128.315)
  Bottom Layer w0.4: v1(100.522,86.555) 100.522,94.895 v1(101.297,95.67) ; v1(130.862,128.315) 130.861,126.779 132.842,124.8 LEDL2.1
pads on no net: U1.13 U1.LHDP U2.1 U2.6 U3.13 U3.LHDP U4.13 U4.LHDP U5.13 U5.LHDP U6.13 U6.LHDP U7.13 U7.LHDP U8.3 U8.17 U8.20 U8.21 U8.22 U8.27 U8.28

## Polygon pours and split planes (outlines as drawn)
NONE on Bottom Layer (solid): 226.251,141.91 ccw(c228.251,141.91) 228.251,139.91 242.251,139.91 ccw(c242.251,141.91) 244.251,141.91 244.251,155.91 ccw(c242.251,155.91) 242.251,157.91 228.251,157.91 ccw(c228.251,155.91) 226.251,155.91 226.251,141.91
GND3 on Bottom Layer (solid): 280.646,172.94 280.946,42.99 47.597,45.44 48.297,174.79
NONE on Top Layer (solid): 226.266,141.89 ccw(c228.266,141.89) 228.266,139.89 242.266,139.89 ccw(c242.266,141.89) 244.266,141.89 244.266,155.89 ccw(c242.266,155.89) 242.266,157.89 228.266,157.89 ccw(c228.266,155.89) 226.266,155.89 226.266,141.89
GND2 on Top Layer (solid): 43.639,179.3 286.688,178.8 289.988,38.1 40.089,39.85

## Keep-outs
Keep-Out Layer:
  lines w0.254: 54.846,71.24 ccw(c75.846,71.24) 75.846,50.24 ; 54.846,139.24 cw(c75.846,139.24) 75.846,160.24 ; 243.846,50.24 ccw(c243.846,71.24) 264.846,71.24 ; 243.846,160.24 cw(c243.846,139.24) 264.846,139.24

## Silkscreen, mask and mechanical layers (free items; w line width, h text height)
Top Overlay:
  text "GND1" at 109.647,147.74 h1.2
  text "220VAC" at 109.697,142.69 h1.2
  text "5V" at 133.697,137.84 h1.2
  text "Rddot" at 226.451,136.275 h1.14
  text "Rudot" at 210.366,136.23 h1.14
  text "ATmega328P" at 104.277,71.135 h1.2
  text "CD4028BE" at 182.616,56.625 h1.2
  text "ИН-12А Nixie tube clock 1.6" at 218.901,55.07 h2.03
  text "Designed and asembled by: Eric García" at 208.622,52.54 h2.03

## Text inside footprints (layer, text, board x,y; h text height)
CLK1: Top Overlay "SCL" at 165.548,150.09 h1.2; Top Overlay "SDA" at 165.421,147.423 h1.2; Top Overlay "VCC" at 165.421,144.883 h1.2; Top Overlay "GND" at 165.421,142.47 h1.2; Top Overlay "ZS-042 / RTC DS3231" at 169.496,155.058 h1.2 r1; Top Overlay "SCL" at 192.091,147.532 h1.2; Top Overlay "SDA" at 192.218,145.119 h1.2; Top Overlay "VCC" at 192.091,142.706 h1.2; Top Overlay "GND" at 192.218,140.293 h1.2; Top Overlay "32K" at 192.091,152.358 h1.2; Top Overlay "SQW" at 191.837,149.945 h1.2; Top Overlay "EPROM 24c32 module" at 169.993,137.877 h1.2; Top Overlay "LIR2032 / CR2032" at 179.01,145.881 h1.2; Top Overlay "Battery" at 179.221,148.877 h1.25 r356
J1: Top Overlay "Source" at 95.542,145.098 h1.14
J2: Top Overlay "P1" at 70.507,93.693 h1.14
J3: Top Overlay "P2" at 70.517,124.343 h1.14
J4: Top Overlay "POT" at 75.867,62.428 h1.14
M1: Top Overlay "VOUT" at 152.624,152.229 h1.2; Top Overlay "170VDC!!" at 150.592,150.557 h1.1; Top Overlay "GND" at 149.322,144.305 h1.2; Top Overlay "VIN" at 145.004,152.229 h1.2; Top Overlay "NCH8200HV" at 144.75,155.473 h1.5
U2: Top Overlay "HC-05" at 217.401,146.894 h2.03
U8: Top Overlay "D1/TX" at 92.796,58.416 h1.02 r95; Top Overlay "GND" at 95.615,83.104 h1.02 r90; Top Overlay "+5V" at 100.949,83.104 h1.02 r90; Top Overlay "D12/MISO" at 128.634,56.006 h1.02 r93; Top Overlay "VIN" at 93.075,83.104 h1.02 r90; Top Overlay "D13/SCK" at 128.888,83.13 h1.02 r93; Top Overlay "GND" at 100.695,59.997 h1.02 r90; Top Overlay "D0/RX" at 95.844,57.993 h1.02 r94; Top Overlay "RESET" at 98.2,58.235 h1.02 r90; Top Overlay "D2" at 103.235,60.996 h1.02 r90; Top Overlay "D3" at 105.775,60.996 h1.02 r90; Top Overlay "D4" at 108.315,60.95 h1.02 r90; Top Overlay "D5" at 110.601,60.996 h1.02 r90; Top Overlay "D6" at 113.141,61.041 h1.02 r90; Top Overlay "D7" at 115.935,60.996 h1.02 r90; Top Overlay "D8" at 118.221,60.996 h1.02 r90; Top Overlay "D9" at 120.761,61.041 h1.02 r90; Top Overlay "D10" at 123.555,60.46 h1.02 r90; Top Overlay "D11/MOSI" at 125.839,56.431 h1.02 r94; Top Overlay "3V3" at 126.349,83.104 h1.02 r90; Top Overlay "AREF" at 123.555,83.104 h1.02 r90; Top Overlay "A0" at 121.269,83.104 h1.02 r90; Top Overlay "A1" at 118.475,83.104 h1.02 r90; Top Overlay "A2" at 116.189,83.104 h1.02 r90; Top Overlay "A3" at 113.395,83.104 h1.02 r90; Top Overlay "A4" at 110.855,83.104 h1.02 r90; Top Overlay "A5" at 108.315,83.104 h1.02 r90; Top Overlay "A6" at 106.029,83.104 h1.02 r90; Top Overlay "A7" at 103.235,83.104 h1.02 r90; Top Overlay "RESET" at 98.155,83.104 h1.02 r90